# Altium PCB 故指测试架接口板.PcbDoc
Units mil, origin at the board's own origin, x right, y up, seen from the top; angles counter-clockwise.
Board outline 3937.01 x 1574.8 mil, 2 copper layers (Top Layer, Bottom Layer); 14 components, 24 nets, 97 pads, 8 vias.
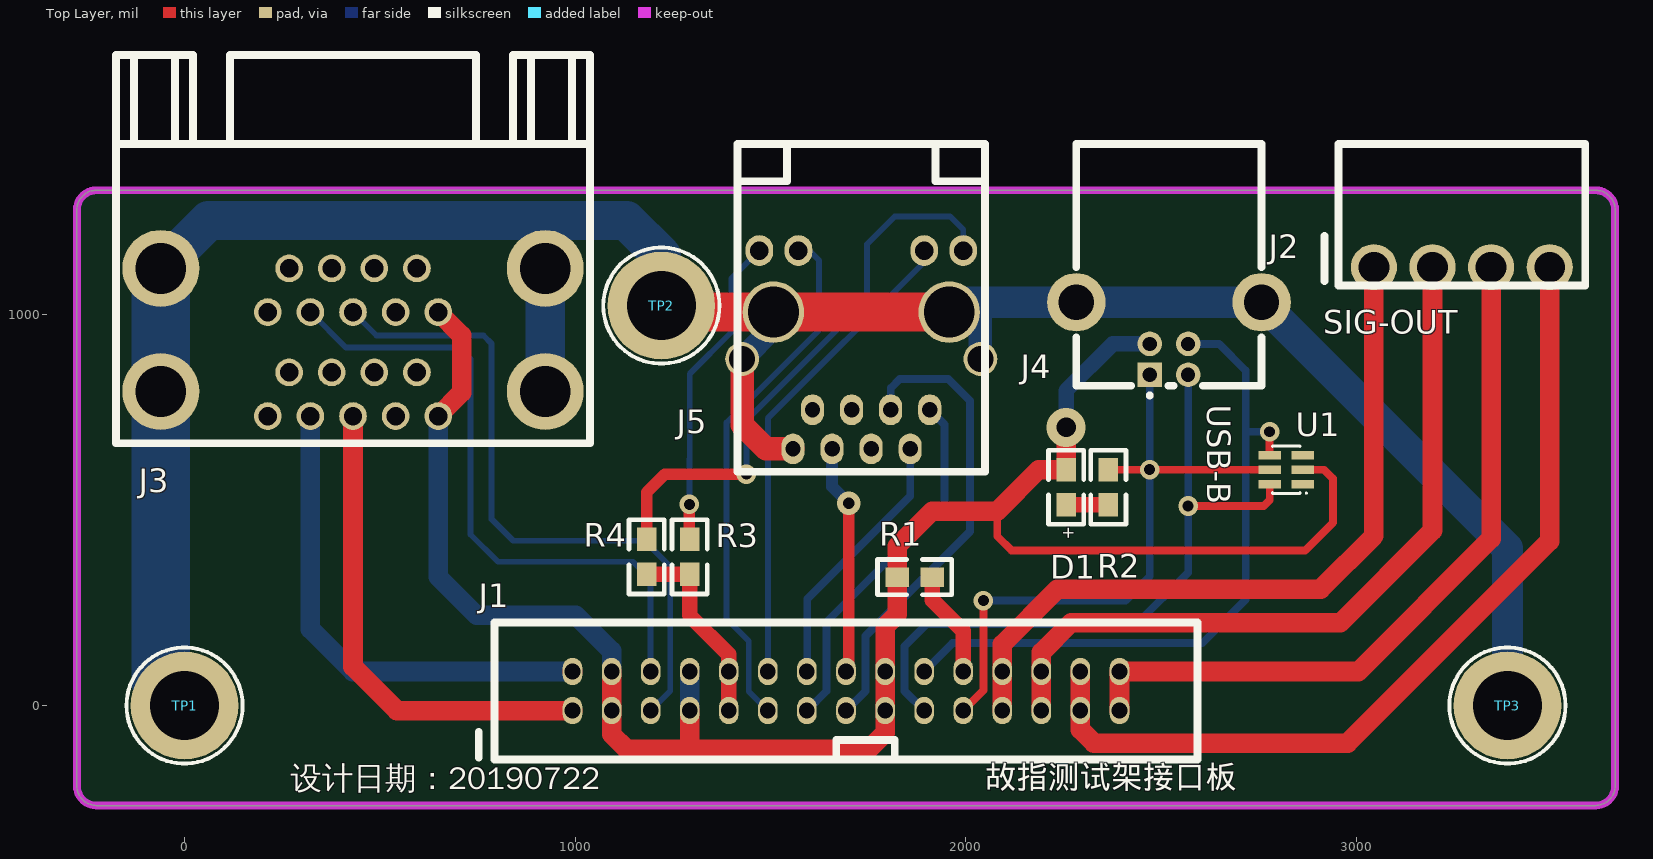
[diagram p0: Top Layer view]
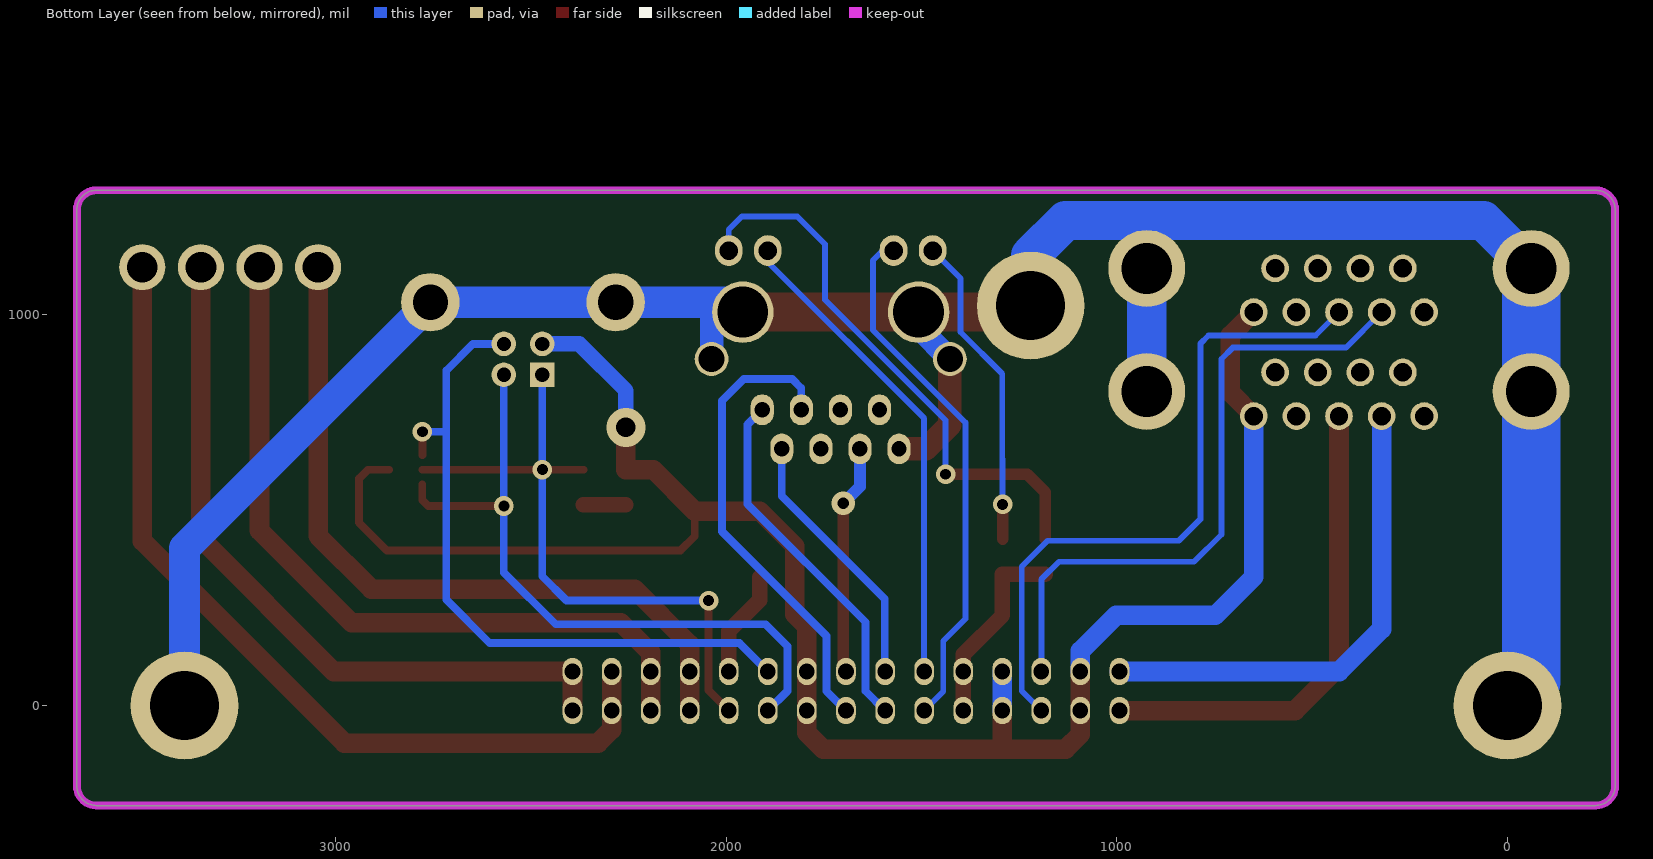
[diagram p1: Bottom Layer view, seen from below]

## Layer stack, top to bottom
Top Solder: solder mask 0.4, Solder Resist, Dk 3.5
Top Layer: signal copper 1.4
Dielectric 1: dielectric 12.6, FR-4, Dk 4.8
Bottom Layer: signal copper 1.4
Bottom Solder: solder mask 0.4, Solder Resist, Dk 3.5

## Board outline
-275.59,-205.91 ccw(c-225.59,-205.91) -225.59,-255.91 3611.42,-255.91 ccw(c3611.42,-205.91) 3661.42,-205.91 3661.42,1268.9 ccw(c3611.42,1268.9) 3611.42,1318.9 -225.59,1318.9 ccw(c-225.59,1268.9) -275.59,1268.9

## Design rules (kind name [scope] priority, off if disabled: settings)
Clearance [All] p1: gap=10 ignorepadtopadclearanceinfootprint=FALSE except(0: Arc-Hole Track-Hole SMDPad-Hole THPad-Hole Via-Hole Fill-Hole Poly-Hole Region-Hole Text-Hole)
HoleSize [All] p1: absolutevalues=TRUE maxlimit=200 minlimit=1 maxpercent=80.000 minpercent=20.000
MinimumSolderMaskSliver [All] p1 off: minsoldermaskwidth=10
PolygonConnect [All] p1: connectstyle=Relief reliefconductorwidth=10 reliefentries=4 polygonreliefangle="90 Angle" airgapwidth=10
RoutingVias [All] p1: holewidth=28 width=50 viastyle="Through Hole" minholewidth=28 minwidth=50 maxholewidth=28 maxwidth=50
SilkToSilkClearance [All] p1 off: silktosilkclearance=10
SilkToSolderMaskClearance [IsPad] p1 off: minsilkscreentomaskgap=10 clearancetoexposedcopper=TRUE
SolderMaskExpansion [All] p1: expansion=4
Width [All] p1: maxlimit=200 minlimit=10 preferedwidth=40
26 further rules are at their usual default settings.

## Components (designator, comment, footprint, x,y, rotation, side; value= is the part's Value field where it differs from the comment)
D1 "LED-0805" LED-0805 2256.21,513.74 r90 top
J1 "" IDC-30 992.91,-12.8 r180 top
J2 "SIG-OUT" KF2EDG3.81 3044.07,1122.05 r0 top locked
J3 "" DB9-2F 213.03,1007.09 r180 top locked
J4 "USB-B" USB-B 2470.25,846.85 r90 top locked
J5 "" HR911105A 1907.26,757.09 r0 top locked
R1 "0" 0805 1823.7,328.3 r0 top
R2 "1k" 0805 2364.21,603.74 r270 top
R3 "1k" 0805 1292.26,425.74 r270 top
R4 "1k" 0805 1182.26,425.74 r270 top
TP1 "" PAD4.5 0,0 r0 top locked
TP2 "" PAD4.5 1220.36,1023.62 r0 top locked
TP3 "" PAD4.5 3385.83,0 r0 top locked
U1 "SRV05-4" SOT23-6 2862.21,566.34 r180 top

## Footprints (in the part's own frame and the unit in brackets; to place one, negate y for a bottom-side part, rotate by r counter-clockwise, add the part's x,y. Pads: shape width x height; smd on the part's side, far side on the other; paste and mask are expansions set on the pad)
0805 [mil]
  rect 60x50 smd: 1(0,0.44) 2(90,0.44)
  silkscreen extent -50,-45 140,45
DB9-2F [mm]
  round 5 hole 3.3: 0(-18.035,-2.84) 0(-18.035,5.16) 0(6.955,-2.84) 0(6.955,5.16)
  round 1.8 hole 1.2: 1(0,0) 2(-2.77,0) 3(-5.54,0) 4(-8.31,0) 5(-11.08,0) 6(-1.385,-2.84) 7(-4.155,-2.84) 8(-6.925,-2.84) 9(-9.695,-2.84) 11(0,6.76) 12(-2.77,6.76) 13(-5.54,6.76) 14(-8.31,6.76) 15(-11.08,6.76) 16(-1.385,3.92) 17(-4.155,3.92) 18(-6.925,3.92) 19(-9.695,3.92)
  silkscreen extent -20.95,-16.72 9.87,8.53
HR911105A [mm]
  round 2.2 hole 1.7: 0(-12.195,3.3) 0(3.295,3.3)
  round 4 hole 3.3: 0(-10.165,6.35) 0(1.265,6.35)
  oval 1.5x2 hole 1: 1(0,0) 2(-1.27,-2.54) 3(-2.54,0) 4(-3.81,-2.54) 5(-5.08,0) 6(-6.35,-2.54) 7(-7.62,0) 8(-8.89,-2.54)
  oval 1.8x2 hole 1.2: 9(2.175,10.35) 10(-0.365,10.35) 11(-8.535,10.35) 12(-11.075,10.35)
  silkscreen extent -12.5,-4.03 3.61,17.27
IDC-30 [mil]
  oval 50x70 hole 40: 1(0,0) 2(0,-100) 3(-100,0) 4(-100,-100) 5(-200,0) 6(-200,-100) 7(-300,0) 8(-300,-100) 9(-400,0) 10(-400,-100) 11(-500,0) 12(-500,-100) 13(-600,0) 14(-600,-100) 15(-700,0) 16(-700,-100) 17(-800,0) 18(-800,-100) 19(-900,0) 20(-900,-100) 21(-1000,0) 22(-1000,-100) 23(-1100,0) 24(-1100,-100) 25(-1200,0) 26(-1200,-100) 27(-1300,0) 28(-1300,-100) 29(-1400,0) 30(-1400,-100)
  silkscreen extent -1600,-225 240,125
KF2EDG3.81 [mm]
  round 3 hole 2: 1(0,0) 2(3.81,0) 3(7.62,0) 4(11.43,0)
  silkscreen extent -3.21,-1.2 13.74,8
LED-0805 [mil]
  rect 60x50 smd: 1(0,0) 2(90,0)
  silkscreen extent -50,-45 140,45
PAD4.5 [mm]
  round 7 hole 4.5: 0(0,0)
  silkscreen extent -3.78,-3.77 3.78,3.77
SOT23-6 [mm] "SOT-23/SC-74A; 5 Leads; Body 3 x 3 mm, inc. leads (LxW max)"
  rect 1.45x0.55 smd: 1(0,0) 2(0,-0.95) 3(0,-1.9) 4(2.15,-1.9) 5(2.15,-0.95) 6(2.15,0)
  silkscreen extent -0.28,-2.5 1.97,0.62
USB-B [mm] "Connector; USB1.1, Type B, Thru-Hole; 4 Position; Right Angle"
  round 3.8 hole 2.3: 0(4.71,4.77) 0(4.71,-7.27)
  rect 1.6x1.6 hole 0.92: 1(0,0)
  round 1.6 hole 0.92: 2(0,-2.5) 3(2,-2.5) 4(2,0)
  silkscreen extent -1.47,-7.27 14.99,4.77

## Part data
J1: library part CON30, "CON30"
J2: library part CON4, "Connector"
J3: library part DB9-2F
J5: library part HR911105A, "HR911105A"
R1 R2 R3 R4: library part R
TP1 TP2 TP3: library part TESTPT

## Via types
v1: diameter 50, hole 28, Top Layer to Bottom Layer, 6 vias
v2: diameter 100, hole 50, Top Layer to Bottom Layer, 1 vias
v3: diameter 60, hole 30, Top Layer to Bottom Layer, 1 vias

## Nets (pads, with @x,y where several pads share a name; then routed paths per layer and width w, separated by ;. In a path a pad name is that pad's centre, name@x,y a point inside that pad or via, vN(x,y) a via of type N, cw(c..) or ccw(c..) an arc to the next point about the centre after c; other vN are vias at no path point)
+3.3VD: J1.9 J1.10 R3.2 R4.2 | length 500
  Top Layer w40: R4.2 R3.2 1292.7,230.74 1392.91,130.52 J1.10 J1.9
AGND: J1.27 J1.28 J2.4 | length 2279.5
  Top Layer w50: J1.28 J1.27 2292.91,-61.48 2327.7,-96.26 2976.75,-96.26 3494.07,421.06 J2.4
CT_VOUT: J1.29 J1.30 J2.3 | length 1886.9
  Top Layer w50: J1.29 J1.30 3004.22,87.2 3344.07,427.06 J2.3
DGND: D1.2 J1.3 J1.4 J1.7 J1.8 J1.17 J1.18 J3.5 J3.15 J4.4 R1.1 U1.2 | length 5032.5
  Top Layer w20: 2080.21,497.74 2080.21,433.51 2116.77,396.94 2867.98,396.94 2939.21,468.18 2939.21,580.74 2916.21,603.74 U1.2
  Top Layer w50: J3.15 708.99,800.68 708.99,947.35 J3.5 ; J1.4 J1.3 1092.91,-73.48 1130.7,-111.26 1297.01,-111.26 ; J1.7 1292.91,-107.16 1297.01,-111.26 ; v2(2256.21,711.74) D1.2 2186.21,603.74 2080.21,497.74 1913.7,497.74 1823.7,407.74 1823.7,233.52 1792.91,202.74 J1.18 J1.17 1792.91,-70.04 1751.7,-111.26 1297.01,-111.26
  Bottom Layer w40: v2(2256.21,711.74) 2256.21,806.07 2375.72,925.59 J4.4
  Bottom Layer w50: J3.15 649.25,329.61 747.87,230.98 1001.8,230.98 1092.91,139.87 J1.4 ; J1.7 J1.8
LED_GREEN_-: J1.12 J5.10 | length 1245.8
  Bottom Layer w15: J1.12@1490.99,89.13 J1.12 1492.91,735.04 1892.89,1135.02 J5.10
LED_YELLOW_-: J1.11 J5.11 | length 1357.6
  Bottom Layer w15: J1.11 1443.99,36.13 1443.99,164.97 1386.86,222.1 1386.86,724.05 1624.21,961.4 1624.21,1139.02 1598.66,1164.57 J5.11
NetD1_1: D1.1 R2.2 | length 108
  Top Layer w40: D1.1@2256.65,513.74 R2.2
NetJ5_9: J5.9 R4.1 | length 1454.3
  Top Layer w30: R4.1 1182.7,545.68 1228.99,591.97 v1(1437.99,591.97)
  Bottom Layer w15: v1(1437.99,591.97) 1437.99,730.11 1746.55,1038.68 1746.55,1180.68 1817.55,1251.68 1959.55,1251.68 1992.89,1218.34 J5.9
NetJ5_12: J5.12 R3.1 | length 813.4
  Top Layer w15: R3.1@1291.99,426.45 R3.1
  Top Layer w30: R3.1@1291.99,426.45 v1(1291.99,514.97)
  Bottom Layer w15: v1(1291.99,514.97) 1292.7,515.68 1292.7,630.94 1292.91,631.16 1292.91,848.9 1399.99,955.97 1399.99,1093.32 J5.12
PE: J3.0 J4.0 J5.0 J5.8 TP1.0 TP2.0 TP3.0 | length 6547.1
  Top Layer w60: J5.0@1427.14,887.01 1427.14,718.09 1488.14,657.09 J5.8
  Top Layer w100: TP2.0 1236.9,1007.09 1507.06,1007.09 J5.0@1957.06,1007.09
  Bottom Layer w60: J5.0@1427.14,887.01 1507.06,966.93 J5.0@1507.06,1007.09 ; 2036,1032 J5.0@2036.98,887.01
  Bottom Layer w80: J5.0@1957.06,1007.09 1982.26,1032.28 2282.46,1032.28 2756.47,1032.28 3385.83,402.93 TP3.0
  Bottom Layer w100: J3.0@-60.79,1118.9 61.29,1240.97 921.99,1240.97 ; J3.0@923.07,803.94 923.07,1118.9 923.07,1239.89 921.99,1240.97 ; TP2.0 1220.36,1151.6 1130.99,1240.97 921.99,1240.97
  Bottom Layer w150: J3.0@-60.79,1118.9 -60.79,803.94 -60.79,60.79 TP1.0
PT100_VOUT: J1.23 J1.24 J2.1 | length 1923.7
  Top Layer w50: J1.23 J1.24 2092.91,156.96 2233.7,297.74 2907.75,297.74 3044.07,434.06 J2.1
PT_VOUT: J1.25 J1.26 J2.2 | length 1953.2
  Top Layer w50: J1.25 J1.26 2192.91,135.96 2268.93,211.97 2957.99,211.97 3194.07,448.06 J2.2
RD+: J1.15 J5.3 | length 1215.2
  Bottom Layer w20: J1.15 1742.7,36.99 1742.7,178 2010.21,445.51 2010.21,780.02 1954.55,835.68 1830.55,835.68 1807.26,812.39 J5.3
RD-: J1.16 J5.6 | length 577.7
  Top Layer w30: J1.16@1699.7,93.99 v3@1699.7,514.74
  Bottom Layer w30: J5.6 1657.26,560.18 v3(1699.7,517.74)
RX1-PC: J1.1 J3.13 | length 1249.5
  Top Layer w50: J3.13 431.14,99.82 543.76,-12.8 J1.1
RX2-PC: J1.5 J3.3 | length 1734.1
  Bottom Layer w15: J3.3 491.25,946.97 764.99,946.97 785.99,925.97 785.99,476.97 840.99,421.97 1176.99,421.97 1242.99,355.97 1242.99,37.28 J1.5
TD+: J1.13 J5.1 | length 931.5
  Bottom Layer w20: J1.13 1642.7,36.99 1642.7,213 1945.21,515.51 1945.21,719.14 J5.1
TD-: J1.14 J5.2 | length 678.3
  Bottom Layer w20: J1.14@1593.7,87.99 1593.7,272.7 1857.26,536.26 J5.2
TX1-PC: J1.2 J3.12 | length 1260.9
  Bottom Layer w50: J3.12 322.08,195.88 430.76,87.2 J1.2
TX2-PC: J1.6 J3.2 | length 1653
  Bottom Layer w15: J3.2 413.2,915.97 702.99,915.97 731.99,886.97 731.99,437.97 801.99,367.97 1147.99,367.97 1192.91,323.05 J1.6
USB_DM: J1.19 J4.2 U1.6 | length 1751.2
  Top Layer w20: v1(2568.68,510.74) 2762.21,510.74 2777.56,526.09 U1.6
  Bottom Layer w20: J1.19 1842.7,37.42 1842.7,151.74 1898.93,207.97 2435.99,207.97 2568.68,340.66 v1(2568.68,510.74) J4.2
USB_DP: J1.20 J4.3 U1.4 | length 1782.1
  Top Layer w20: v1(2777.21,700.74) 2777.21,641.5 U1.4
  Bottom Layer w20: J1.20 1965.45,159.74 2604.66,159.74 2716.21,271.28 2716.21,700.74 ; J4.3 2647.9,925.59 2716.21,857.28 2716.21,700.74 ; v1(2777.21,700.74) 2716.21,700.74
USB_ID: J1.22 R1.2 | length 274.3
  Top Layer w40: R1.2 1913.7,269.96 1992.91,190.74 J1.22
USB_VBUS: J1.21 J4.1 R2.1 U1.5 | length 1683.7
  Top Layer w20: J1.21 2044.7,38.99 v1(2044.7,268.74) ; R2.1@2364.21,603.74 v1(2470.21,603.74) U1.5
  Bottom Layer w20: v1(2044.7,268.74) 2408.21,268.74 2470.25,330.78 J4.1
pads on no net: J3.1 J3.4 J3.6 J3.7 J3.8 J3.9 J3.11 J3.14 J3.16 J3.17 J3.18 J3.19 J5.4 J5.5 J5.7 U1.1 U1.3

## Keep-outs
Keep-Out Layer:
  the board outline again, w20

## Other copper
Bottom Layer:
  region: 1957.06,967.72

## Silkscreen, mask and mechanical layers (free items; w line width, h text height)
Top Overlay:
  text "故指测试架接口板" at 2048.99,-231.03 h100
  text "设计日期：20190722" at 271.99,-234.03 h100
Mechanical 1:
  lines w20: -275.59,-205.91 ccw(c-225.59,-205.91) -225.59,-255.91 3611.42,-255.91 ccw(c3611.42,-205.91) 3661.42,-205.91 3661.42,-177.03 3661.42,1268.9 ccw(c3611.42,1268.9) 3611.42,1318.9 -225.59,1318.9 ccw(c-225.59,1268.9) -275.59,1268.9 -275.59,-205.91

## Text inside footprints (layer, text, board x,y; h text height)
D1: Top Overlay "+" at 2275.21,424.74 h30 r90